# EAGLE board Leaf (EAGLE 6.1)

Size 54.61 x 24.13 mm. Coordinates in mm from the lower left corner, seen from the top.
Outline: 0,0 54.61,0 54.61,24.13 0,24.13 0,0
Copper layers (1*16): Top 0.035mm / dielectric 1.5mm / Bottom 0.035mm
Design rules: minimum track width 10mil, minimum drill 24mil, track to track 8mil, track to pad 8mil, pad to pad 8mil, via to via 8mil, smd to smd 8mil, copper to edge 40mil, drill to drill 8mil, minimum pad ring 10mil, minimum via ring 8mil, stop-mask expansion 4mil, vias tented up to drill 0mil, thermal gap 10mil

## Footprints (pad centres in the part's own frame; a part is rotated, then mirrored left to right if it is on the bottom)
LEAF = drill 1.1 octagon: 1 -1.27,16.51; 2 1.27,16.51

## Placement (x,y rotation side)
U$1  LEAF  [LEAF]  19.05,12.06 90 top

## Library data of the parts
U$1 = mark_1